# Altium PCB SSST.PcbDoc
Units mm, origin at the board's own origin, x right, y up, seen from the top; angles counter-clockwise.
Board outline 50 x 30 mm, 4 copper layers (L1, L2, L3, L4), stack 1.486 mm thick; 72 components, 50 nets, 284 pads, 90 vias.
Unrouted connection lines stored in the file: 1.
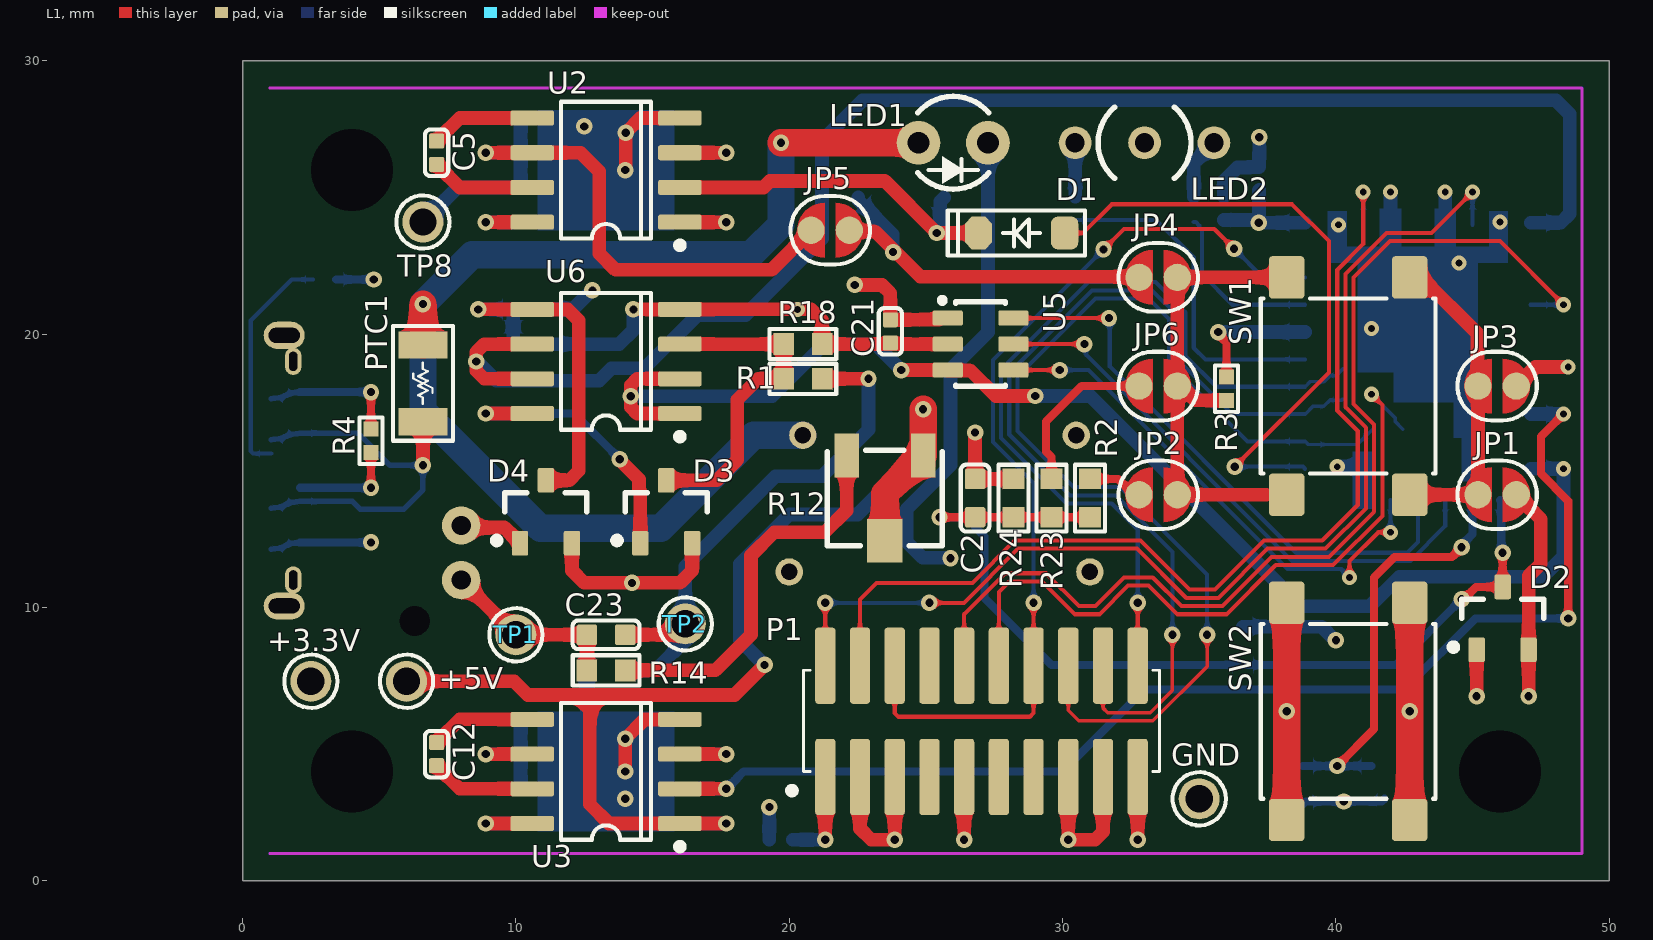
[diagram p0: L1 view]
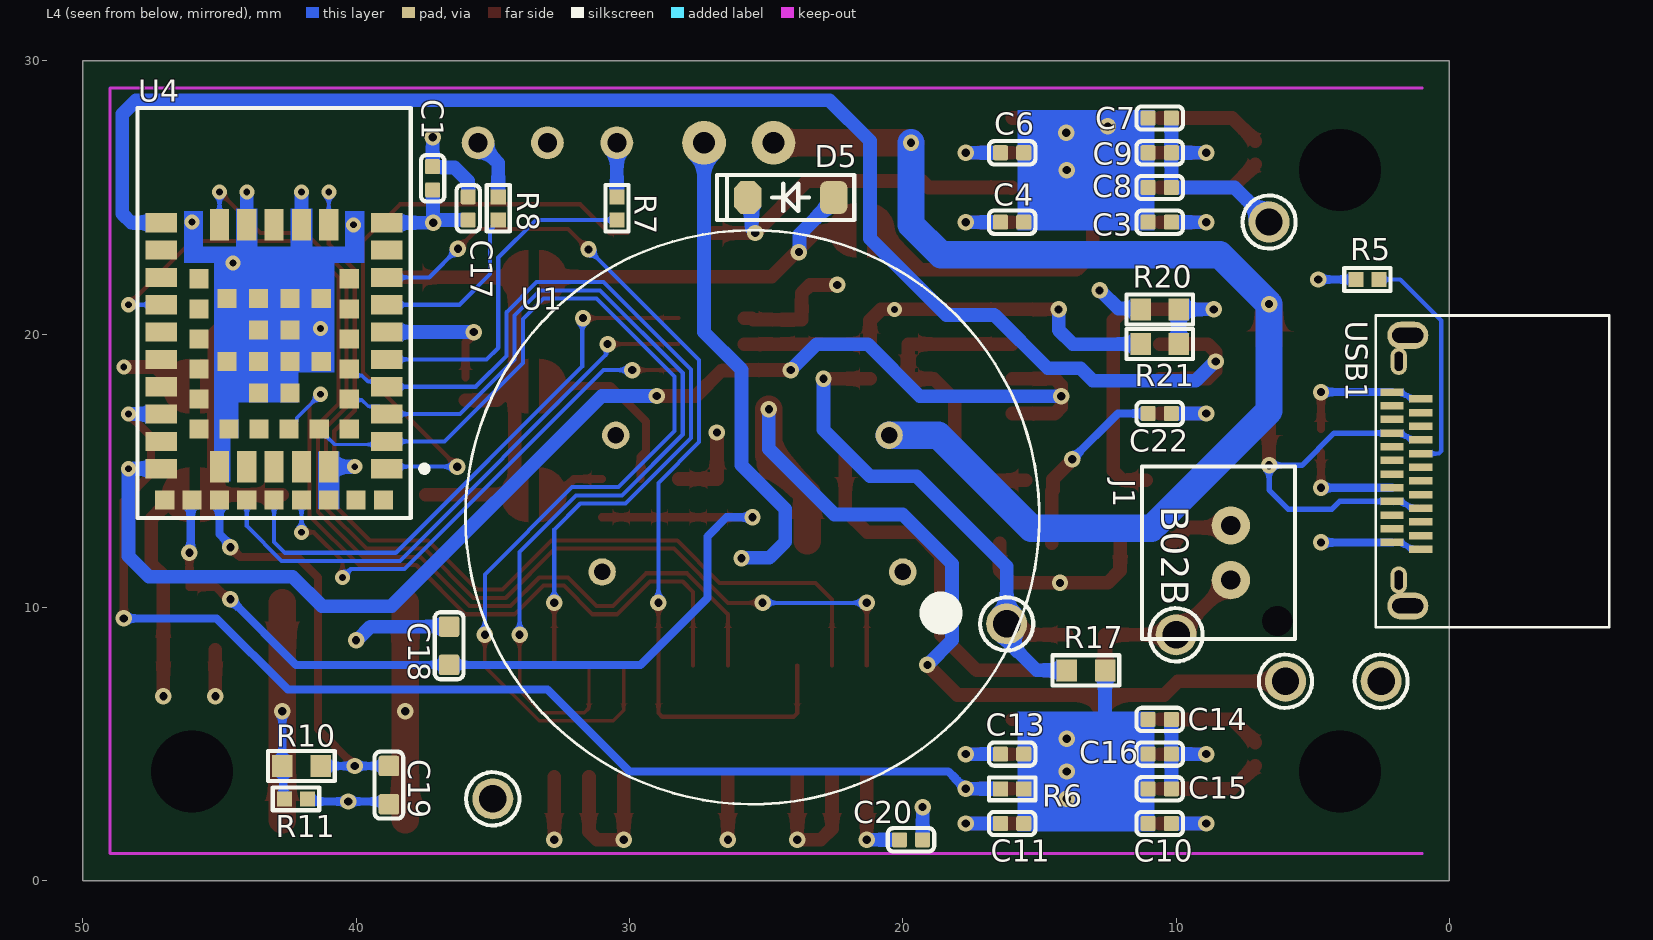
[diagram p1: L4 view, seen from below]
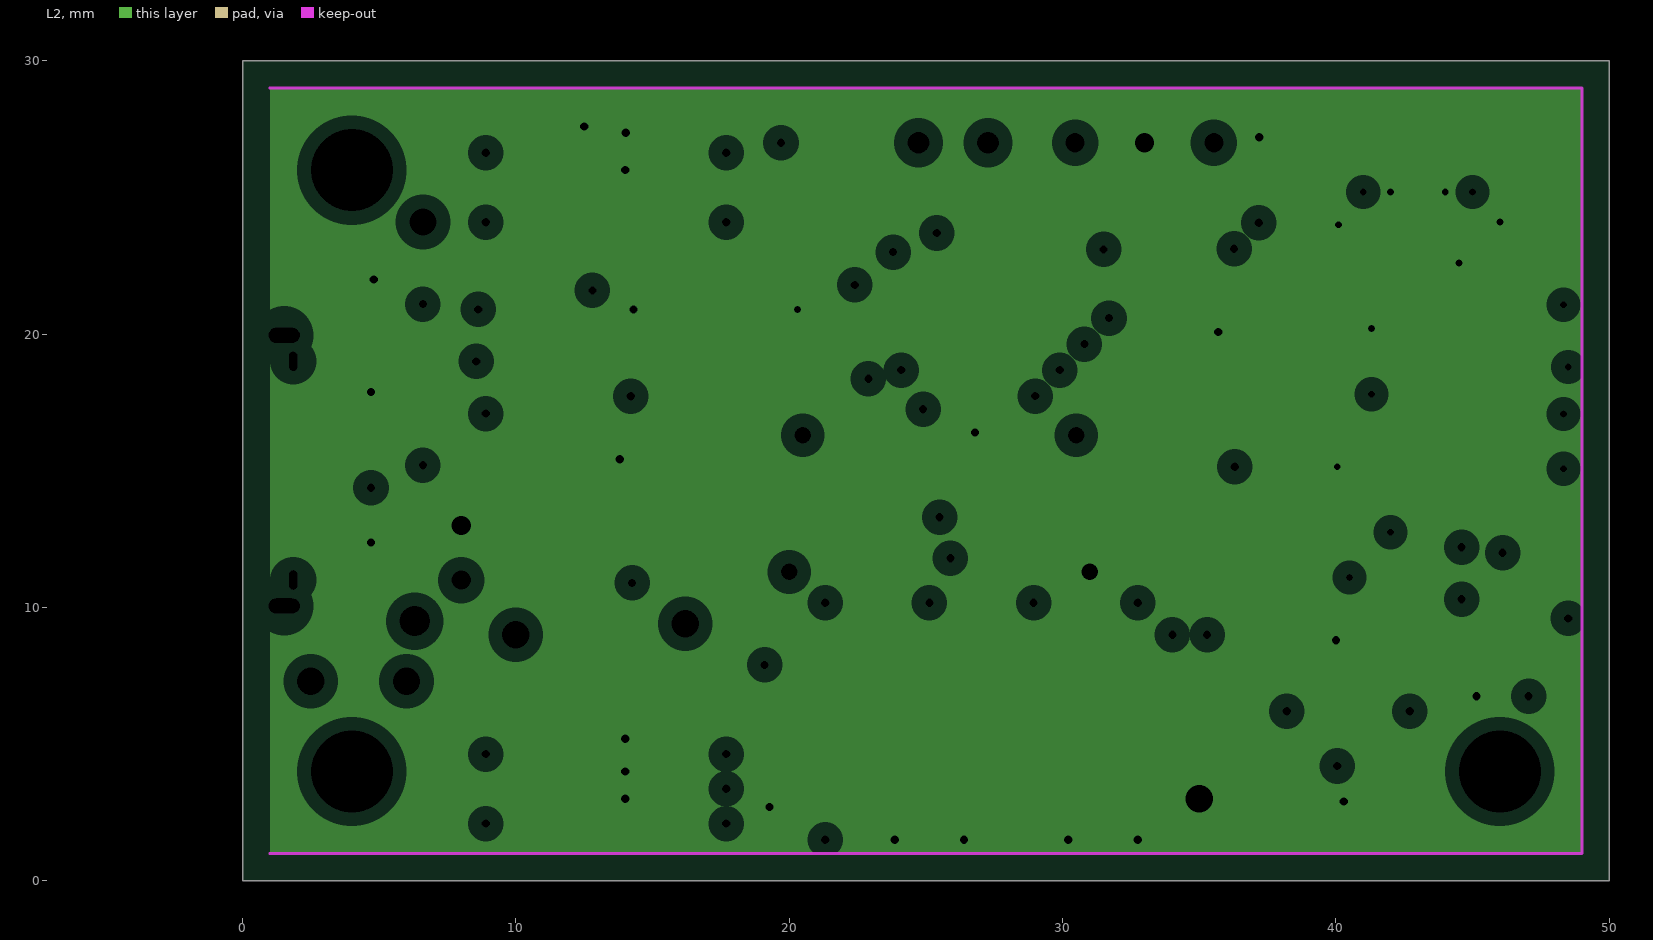
[diagram p2: L2, clearances drawn from the general rule]
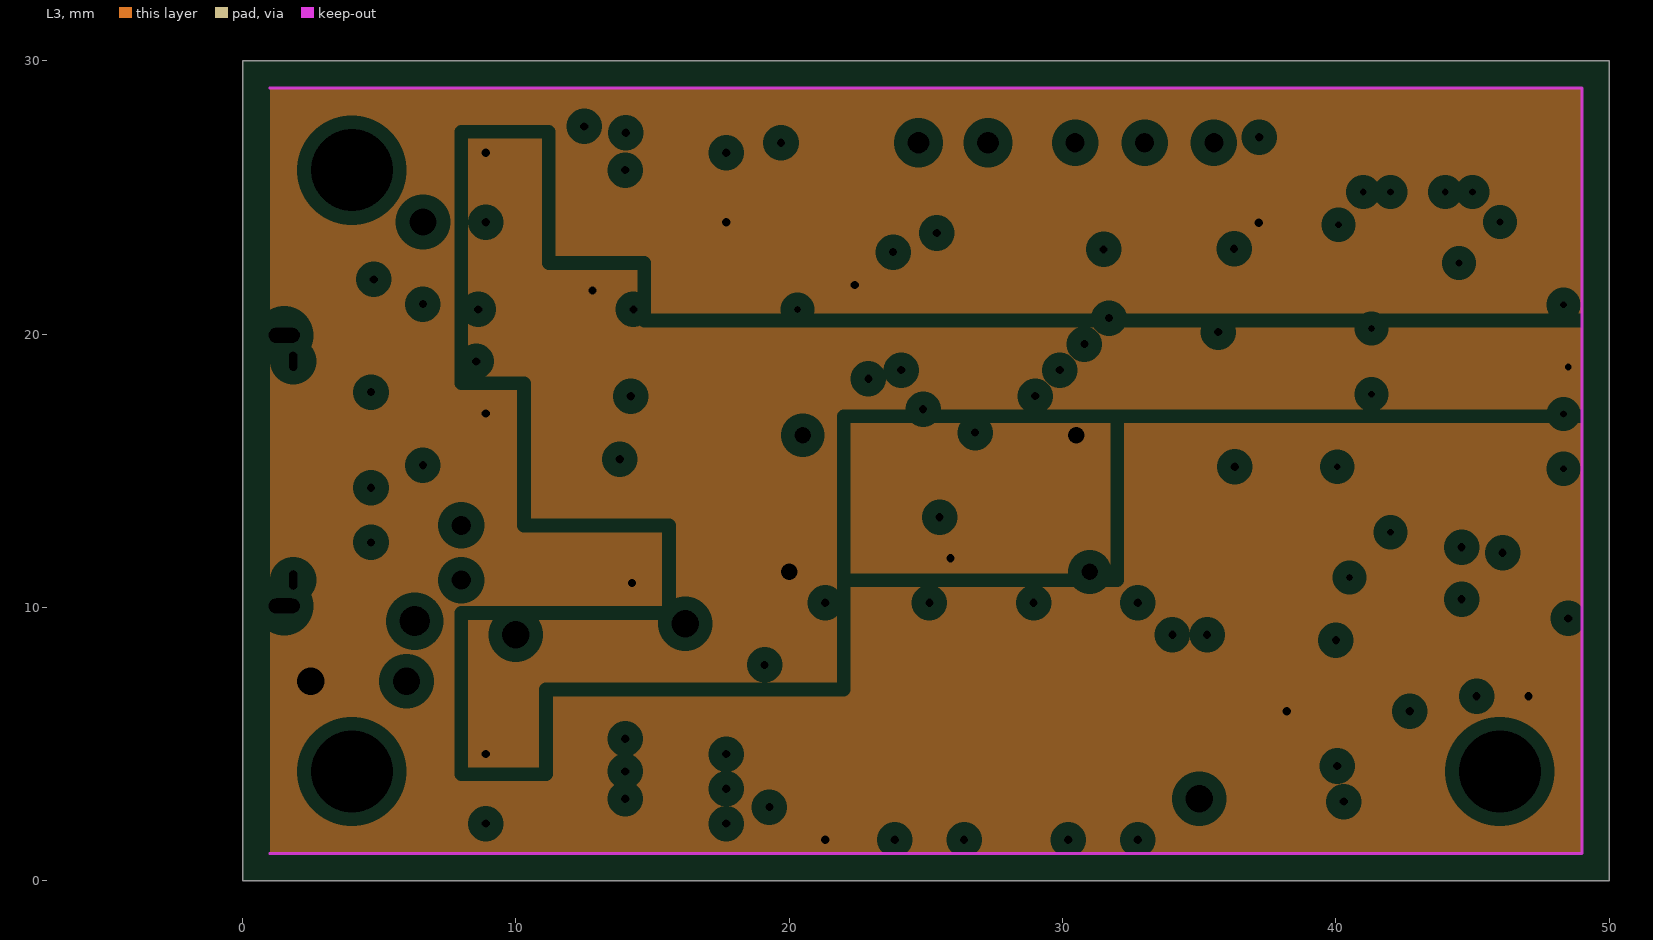
[diagram p3: L3, clearances drawn from the general rule]

## Layer stack, top to bottom
Top Solder: solder mask 0.01, Solder Resist, Dk 3.5
L1: signal copper 0.043
Prepreg: prepreg 0.2, R1551, Dk 4.8
L2: plane copper 0.035, net GND
Core: core 0.93, R1566, Dk 4.8
L3: plane copper 0.035, net (Multiple Nets)
Prepreg: prepreg 0.2, R1551, Dk 4.8
L4: signal copper 0.043
Bottom Solder: solder mask 0.01, Solder Resist, Dk 3.5

## Board outline
0,0 50,0 50,30 0,30

## Design rules (kind name [scope] priority, off if disabled: settings)
AcuteAngle [All] p1: minimum=4.50000000000000E+0001 checktracksonly=FALSE
AssemblyTestPointUsage [All] p1: valid=2
Clearance Clearance_BoardEdge_Poly [OnCopper and InPoly vs IsKeepOut] p1: gap=0.5 ignorepadtopadclearanceinfootprint=FALSE except(0: Arc-Hole Track-Hole SMDPad-Hole THPad-Hole Via-Hole Fill-Hole Poly-Hole Region-Hole Text-Hole)
Clearance Clearance_Poly [InPolygon] p2: gap=0.3 ignorepadtopadclearanceinfootprint=FALSE except(0: Arc-Hole Track-Hole SMDPad-Hole THPad-Hole Via-Hole Fill-Hole Poly-Hole Region-Hole Text-Hole)
Clearance [All] p3: gap=0.15 ignorepadtopadclearanceinfootprint=FALSE except(0: Arc-Hole Track-Hole SMDPad-Hole THPad-Hole Via-Hole Fill-Hole Poly-Hole Region-Hole Text-Hole)
DiffPairsRouting [All] p1: maxlimit=0.3 minlimit=0.15 mostfreqgap=0.15 toplayer_minwidth=0.16 toplayer_maxwidth=0.3 toplayer_prefwidth=0.16 bottomlayer_minwidth=0.16 bottomlayer_maxwidth=0.3 bottomlayer_prefwidth=0.16 maxuncoupledlength=5
FabricationTestPointUsage TestPointUsage [All] p1: valid=2 allowmultiple=FALSE
FabricationTestpoint Testpoint [All] p1: side=3 testpointundercomponent=TRUE minsize=1.016 maxsize=2.54 preferedsize=1.524 minholesize=0 maxholesize=1.016 preferedholesize=0.813 testpointgrid=0.025 allowsidetop=TRUE allowsidebottom=TRUE usegrid=TRUE gridtolerance=0
Height [All] p1: minheight=0 maxheight=30 prefheight=12.7
HoleSize [All] p1: absolutevalues=TRUE maxlimit=6 minlimit=0.25 maxpercent=80.000 minpercent=20.000
HoleToHoleClearance [All] p1: gap=0.45 allowstackedmicrovias=TRUE
MinimumAnnularRing [All] p1: minimumring=0.15
MinimumSolderMaskSliver [All] p1: minsoldermaskwidth=0.1
PlaneClearance [All] p1: clearance=0.5
PlaneConnect PlaneConnect_Via [IsVia] p1: planeconnectstyle=Direct reliefexpansion=0.508 reliefentries=4 reliefconductorwidth=0.254 reliefairgap=0.254
PlaneConnect [All] p2: planeconnectstyle=Relief reliefexpansion=0.3 reliefentries=4 reliefconductorwidth=0.3 reliefairgap=0.3
PolygonConnect PolygonConnect_Via [IsVia] p1: connectstyle=Direct reliefconductorwidth=0.254 reliefentries=4 polygonreliefangle="90 Angle" airgapwidth=0.254
PolygonConnect [All] p2: connectstyle=Relief reliefconductorwidth=0.3 reliefentries=4 polygonreliefangle="90 Angle" airgapwidth=0.3
RoutingVias [All] p1: holewidth=0.3 width=0.6 viastyle="Through Hole" minholewidth=0.25 minwidth=0.55 maxholewidth=6 maxwidth=8
SilkToSilkClearance [All] p1 off: silktosilkclearance=0.1
SilkToSolderMaskClearance SilkscreenOverComponentPads [IsPad] p1: minsilkscreentomaskgap=0 clearancetoexposedcopper=FALSE
SolderMaskExpansion [All] p1: expansion=0.05 istentingtop=FALSE
Width [All] p1: maxlimit=10 minlimit=0.127 preferedwidth=0.15
18 further rules are at their usual default settings.

## Classes and differential pairs
component class U_POW: C2 C3 C4 C5 C6 C7 C8 C9 C10 C11 C12 C13 C14 C15 C16 C18 D1 D2 D5 JP1 JP2 JP3 JP4 JP5 JP6 LED1 PTC1 R2 R3 R4 R5 R6 R23 R24 SW1 TP7 TP8 TP9 TP10 U1 U2 U3 USB1
component class U_ADC: C21 C22 C23 D3 D4 J1 R1 R12 R14 R17 R18 R20 R21 TP1 TP2 U5 U6
component class U_MCU: C1 C17 C19 C20 LED2 P1 R7 R8 R10 R11 SW2 U4

## Components (designator, comment, footprint, x,y, rotation, side; value= is the part's Value field where it differs from the comment)
+3.3V "TP1mm" TP1mm 2.5,7.3 r0 top (schematic designator TP9)
+5V "TP1mm" TP1mm 6,7.3 r90 top (schematic designator TP10)
C1 "GRM155R60J106ME15D" C1005 37.2,25.7 r270 bottom
C2 "GRM188R72A104MA35D" C1608 26.8,14 r270 top
C3 "GRM155R61A475MEAAD" C1005 10.6,24.095 r180 bottom
C4 "GRM155R61A475MEAAD" C1005 16,24.095 r180 bottom
C5 "GRM155R61A224KE19J" C1005 7.1,26.635 r270 top
C6 "GRM155R61A102KA01D" C1005 16,26.635 r0 bottom
C7 "GRM155R60J106ME15D" C1005 10.6,27.905 r180 bottom
C8 "GRM155R60J106ME15D" C1005 10.6,25.365 r180 bottom
C9 "GRM155R61A475MEAAD" C1005 10.6,26.635 r180 bottom
C10 "GRM155R61A475MEAAD" C1005 10.6,2.095 r180 bottom
C11 "GRM155R61A475MEAAD" C1005 16,2.095 r180 bottom
C12 "GRM155R61A224KE19J" C1005 7.1,4.635 r270 top
C13 "GRM155R61A102KA01D" C1005 16,4.635 r0 bottom
C14 "GRM155R60J106ME15D" C1005 10.6,5.905 r180 bottom
C15 "GRM155R60J106ME15D" C1005 10.6,3.365 r180 bottom
C16 "GRM155R61A475MEAAD" C1005 10.6,4.635 r180 bottom
C17 "GRM155R61A104KA01J" C1005 35.9,24.6 r270 bottom
C18 "GRM188R72A104MA35D" C1608 36.6,8.6 r270 bottom
C19 "GRM188R72A104MA35D" C1608 38.8,3.5 r90 bottom
C20 "GRM155R61A104KA01J" C1005 19.7,1.5 r0 bottom
C21 "GRM155R61A104KA01J" C1005 23.7,20.1 r90 top
C22 "GRM155R61A104KA01J" C1005 10.6,17.095 r180 bottom
C23 "GRM188D71A106KA73D" C1608 13.3,9 r180 top
D1 "CDBW0520L-G" SOD-123 28.5,23.7 r0 top
D2 "BAT54SHE3-TP" SOT-23 46.1,9.6 r90 top
D3 "BAT54SHE3-TP" SOT-23 15.5,13.5 r90 top
D4 "BAT54SHE3-TP" SOT-23 11.1,13.5 r90 top
D5 "CDBW0520L-G" SOD-123 24.1,25 r180 bottom
GND "TP1mm" TP1mm 35,3 r0 top (schematic designator TP7)
J1 "B02B-PASK-1" B02B-PASK-1 8,12 r270 bottom
JP1 "SMD_JAMPER" SMD_JAMPER 45.9,14.125 r180 top
JP2 "SMD_JAMPER" SMD_JAMPER 33.5,14.125 r180 top
JP3 "SMD_JAMPER" SMD_JAMPER 45.9,18.1 r180 top
JP4 "SMD_JAMPER" SMD_JAMPER 33.5,22.075 r180 top
JP5 "SMD_JAMPER" SMD_JAMPER 21.5,23.8 r0 top
JP6 "SMD_JAMPER" SMD_JAMPER 33.5,18.1 r180 top
LED1 "WP710A10QBC/D" LED_T1 26,27 r90 top
LED2 "EALP03RDHRGA1" LED3COLORS 33,27 r180 top
P1 "FTSH-110-01-F-DV-K-P-TR" "Headerpin 2x10" 21.32,3.8 r90 top locked
PTC1 "1206L016WR" 1206L 6.6,18.2 r90 top
R1 "RG1608P-114-B-T5" R1608 20.5,18.365 r180 top
R2 "RT0603BRE0710KL" R1608 31,14 r270 top
R3 "RT0402BRD0710KL" R1005 36,18 r270 top
R4 "RG1005P-512-B-T5" R1005 4.7,16.1 r90 top
R5 "RG1005P-512-B-T5" R1005 3,22 r0 bottom
R6 "RG1005P-103-B-T5" R1005 16,3.365 r0 bottom
R7 "RT0402BRD073K3L" R1005 30.46,24.6 r270 bottom
R8 "RG1005P-332-B-T5" R1005 34.8,24.6 r270 bottom
R10 "RT0603BRE0710KL" R1608 42,4.2 r180 bottom
R11 "RG1005P-103-B-T5" R1005 42.2,3 r0 bottom
R12 "SM-3TW502" SM-3TW 23.5,14 r270 top
R14 "RT0603CRE071KL" R1608 13.3,7.7 r0 top
R17 "RT0603DRD071ML" R1608 13.3,7.7 r0 bottom
R18 "RT0603DRD07200KL" R1608 20.5,19.635 r180 top
R20 "RT0603BRE0730KL" R1608 10.6,20.905 r180 bottom
R21 "RG1608P-114-B-T5" R1608 10.6,19.635 r180 bottom
R23 "RT0603BRE0730KL" R1608 29.6,14 r270 top
R24 "RG1608P-114-B-T5" R1608 28.2,14 r270 top
SW1 "PTS645SK95SMTR92LFS" PTS645SK13SMTR92LFS 40.45,18.1 r270 top
SW2 "PTS645SK95SMTR92LFS" PTS645SK13SMTR92LFS 40.45,6.2 r90 top
TP1 "TP1mm" TP1mm 10,9 r0 top
TP2 "TP1mm" TP1mm 16.2,9.4 r0 top
TP8 "TP1mm" TP1mm 6.6,24.1 r0 top
U1 "CLB2032BUPB" CLB2032BUPB 25.5,13.3 r180 bottom locked
U2 "LTC1682IS8-3.3#PBF" SOIC8_3.9mm 13.3,26 r180 top
U3 "LTC1682IS8-5#PBF" SOIC8_3.9mm 13.3,4 r180 top
U4 "NINA-B302" NINA_LGA67R_1500X1000X338_PIFA 43,20.775 r90 bottom locked
U5 "AD7680BRJZ" SOT-23-6 27,19.635 r270 top
U6 "OPA2330AIDR" SOIC8_3.9mm 13.3,19 r180 top
USB1 "DX07W024JA1R1000" DX07W024JA1R1000 2.1,12.379 r90 bottom locked

## Footprints (in the part's own frame and the unit in brackets; to place one, negate y for a bottom-side part, rotate by r counter-clockwise, add the part's x,y. Pads: shape width x height; smd on the part's side, far side on the other; paste and mask are expansions set on the pad)
1206L [mm] "Resettable PTC 3.2mm x 1.6mm"
  rect 1x1.8 smd mask+0.05: 1(-1.4,0) 2(1.4,0)
  silkscreen extent -2.1,-1.1 2.1,1.1, body extent -1.6,-0.8 1.6,0.85, height 1
B02B-PASK-1 [mm] "JST2ピンコネクタ"
  round 1.4 hole 0.7: 1(1,0) 2(-1,0)
  round 0.8 hole 1.1 unplated: boss(2.5,1.7)
  silkscreen extent -3.15,-3.25 3.15,2.35, body extent -3,-3.1 3,2.2, height 7.75
C1005 [mm] "Ceramic capacitor 1mm x 0.5mm"
  rrect20% 0.55x0.55 smd mask+0.05: 1(-0.425,0) 2(0.425,0)
  silkscreen extent -0.85,-0.43 0.85,0.43, body extent -0.5,-0.25 0.5,0.25, height 0.5
C1608 [mm] "Ceramic capacitor 1.6mm x 0.8mm"
  rrect20% 0.75x0.75 smd mask+0.05: 1(-0.7,0) 2(0.7,0)
  silkscreen extent -1.23,-0.53 1.23,0.53, body extent -0.8,-0.4 0.8,0.4, height 0.8
CLB2032BUPB [mm] "3.7V出力電池　ピン出力タイプ"
  round 1 hole 0.6: 1(5.5,-2) 2(5,3) 3(-5,3) 4(-5.5,-2)
  silkscreen extent -10.5,-10.5 10.5,10.5, body extent -10.27,-10.27 10.27,10.27, height 5
DX07W024JA1R1000 [mm] "USB3.1 Type-C"
  rect 0.27x0.85 smd paste+0 mask+0.05: A1(0,0) A2(0.5,0) A3(1,0) A4(1.5,0) A5(2,0) A6(2.5,0) A7(3,0) A8(3.5,0) A9(4,0) A10(4.5,0) A11(5,0) A12(5.5,0) B1(5.25,-1.05) B2(4.75,-1.05) B3(4.25,-1.05) B4(3.75,-1.05) B5(3.25,-1.05) B6(2.75,-1.05) B7(2.25,-1.05) B8(1.75,-1.05) B9(1.25,-1.05) B10(0.75,-1.05) B11(0.25,-1.05) B12(-0.25,-1.05)
  oval 1x1.5 hole 0.55 slot 1.15 at 90 deg mask+0.05: S(-2.325,-0.575) S(7.575,-0.575)
  oval 1x0.6 hole 0.3 slot 0.7 at 0 deg mask+0.05: S(-1.375,-0.245) S(6.625,-0.245)
  silkscreen extent -3.1,-7.94 8.3,0.6, body extent -2.97,-7.88 8.23,0.17, height 3.6
"Headerpin 2x10" [mm] "Headerpin 2x10,1.27mm Pitch"
  rrect30% 2.79x0.74 smd: 1(0,0) 2(4.07,0) 3(0,-1.27) 4(4.07,-1.27) 5(0,-2.54) 6(4.07,-2.54) 7(0,-3.81) 8(4.07,-3.81) 9(0,-5.08) 10(4.07,-5.08) 11(0,-6.35) 12(4.07,-6.35) 13(0,-7.62) 14(4.07,-7.62) 15(0,-8.89) 16(4.07,-8.89) 17(0,-10.16) 18(4.07,-10.16) 19(0,-11.43) 20(4.07,-11.43)
  silkscreen extent -0.62,-12.23 3.9,1.34, body extent -0.92,-12.05 6.45,0.65, height 6.99
LED3COLORS [mm]
  round 1.2 hole 0.7: 1(-2.54,0) 2(0,0) 3(2.54,0)
  silkscreen extent -1.7,-1.3 1.7,1.3, body extent -2.25,-1.5 2.25,1.9, height 9.5
LED_T1 [mm] "3mm (T1) package"
  round 1.6 hole 0.8: A(0,1.27) K(0,-1.27)
  silkscreen extent -1.7,-1.3 1.7,1.3, body extent -2,-1.5 2,2, height 9.6
NINA_LGA67R_1500X1000X338_PIFA [mm] "Stand-alone Bluetooth low energy module"
  rect 0.7x1.15 smd paste+0 mask+0.05: 1(-5.7,-4.125) 2(-4.7,-4.125) 3(-3.7,-4.125) 4(-2.7,-4.125) 5(-1.7,-4.125) 6(-0.7,-4.125) 7(0.3,-4.125) 8(1.3,-4.125) 9(2.3,-4.125) 10(3.3,-4.125) 16(3.3,4.125) 17(2.3,4.125) 18(1.3,4.125) 19(0.3,4.125) 20(-0.7,4.125) 21(-1.7,4.125) 22(-2.7,4.125) 23(-3.7,4.125) 24(-4.7,4.125) 25(-5.7,4.125)
  rect 1.15x0.7 smd paste+0 mask+0.05: 11(3.225,-2) 12(3.225,-1) 13(3.225,0) 14(3.225,1) 15(3.225,2) 26(-5.625,2) 27(-5.625,1) 28(-5.625,0) 29(-5.625,-1) 30(-5.625,-2)
  rect 0.7x0.7 smd paste+0 mask+0.05: 31(-4.25,-2.75) 32(-3.15,-2.75) 33(-2.05,-2.75) 34(-0.95,-2.75) 35(0.15,-2.75) 36(1.25,-2.75) 37(1.25,2.75) 38(0.15,2.75) 39(-0.95,2.75) 40(-2.05,2.75) 41(-3.15,2.75) 42(-4.25,2.75) 43(-4.25,1.65) 44(-4.25,0.55) 45(-4.25,-0.55) 46(-4.25,-1.65) 47(-6.85,4) 48(-6.85,3) 49(-6.85,2) 50(-6.85,1) 51(-6.85,0) 52(-6.85,-1) 53(-6.85,-2) 54(-6.85,-3) 55(-6.85,-4) 56(-2.925,-0.575) 57(-2.925,0.575) 58(-1.775,-1.725) 59(-1.775,-0.575) 60(-1.775,0.575) 61(-1.775,1.725) 62(-0.625,-0.575) 63(-0.625,0.575) 64(0.525,-1.725) 65(0.525,-0.575) 66(0.525,0.575) 67(0.525,1.725)
  silkscreen extent -7.5,-5.6 7.5,5, body extent -7.5,-5 7.5,5, height 3.91
PTS645SK13SMTR92LFS [mm]
  rrect20% 1.55x1.3 smd: 1(-3.975,2.25) 2(3.975,2.25) 3(-3.975,-2.25) 4(3.975,-2.25)
  silkscreen extent -3.2,-3.2 3.2,3.2, body extent -4.5,-3 4.5,3, height 9.5
R1005 [mm]
  rect 0.55x0.55 smd mask+0.05: 1(-0.425,0) 2(0.425,0)
  silkscreen extent -0.85,-0.42 0.85,0.42, body extent -0.5,-0.25 0.5,0.25, height 0.35
R1608 [mm]
  rect 0.75x0.8 smd mask+0.05: 1(-0.7,0) 2(0.7,0)
  silkscreen extent -1.22,-0.55 1.22,0.55, body extent -0.8,-0.4 0.8,0.4, height 0.45
SM-3TW [mm] "SURFACE MOUNT CERMET TRIMMER Top adjustmet"
  rect 1.6x0.9 smd: 1(-1.56,1.4) 3(-1.56,-1.4)
  rect 1.6x1.3 smd: 2(1.56,0)
  silkscreen extent -1.75,-2.1 1.75,2.1, body extent -1.6,-1.95 1.6,1.95, height 4.2
SMD_JAMPER [mm]
  round 1 smd: 1(-0.7,0) 2(0.7,0)
  L1 region: 0.2,1 0.2,-1 0.583,-0.924 0.907,-0.707 1.124,-0.383 1.2,0 1.2,0 1.124,0.383 0.907,0.707 0.583,0.924 0.2,1
  L1 region: -0.2,1 -0.2,-1 -0.583,-0.924 -0.907,-0.707 -1.124,-0.383 -1.2,0 -1.2,0 -1.124,0.383 -0.907,0.707 -0.583,0.924 -0.2,1
  silkscreen extent -1.45,-1.25 1.45,1.25
SOD-123 [mm]
  rrect50% 1x1.2 smd: A(1.575,0)
  oct 1x1.2 smd: K(-1.575,0)
  silkscreen extent -2.7,-0.82 2.32,0.82, body extent -1.96,-0.9 1.96,0.9, height 1.35
SOIC8_3.9mm [mm] "3.9mm Wide,1.27mm Pitch"
  rrect30% 1.6x0.55 smd: 1(-2.7,1.905) 2(-2.7,0.635) 3(-2.7,-0.635) 4(-2.7,-1.905) 5(2.7,-1.905) 6(2.7,-0.635) 7(2.7,0.635) 8(2.7,1.905)
  silkscreen extent -2.83,-2.5 1.65,2.87, body extent -3.1,-2.5 3.1,2.5, height 1.75
SOT-23 [mm] "SOT23, 3-Leads, Body 2.9x1.3mm, Pitch 0.95mm, Lead Span 2.4mm"
  rrect20% 0.9x0.6 smd: 1(-1.15,0.95) 2(-1.15,-0.95) 3(1.15,0)
  silkscreen extent -1.17,-1.5 0.7,1.92, body extent -1.5,-1.5 1.5,1.5, height 1.3
SOT-23-6 [mm] "SOT-23/SC-74A; 6 Leads; Body 3.1 x 3.1 mm"
  rrect20% 0.55x1.1 smd: 1(-0.95,-1.2) 2(0,-1.2) 3(0.95,-1.2) 4(0.95,1.2) 5(0,1.2) 6(-0.95,1.2)
  silkscreen extent -1.7,-1.5 1.55,0.9, body extent -1.45,-1.4 1.45,1.4, height 1.45
TP1mm [mm] "TEST POINT 径1mm"
  round 1.5 hole 1: 1(0,0)
  silkscreen extent -0.97,-0.97 0.97,0.97

## Part data
+3.3V +5V GND TP1 TP2 TP8: "Test-Point 1mm"
C1 C7 C8 C14 C15: library part C1005, "セラコン1005サイズ", Voltage=6.3V, Tag=10μF, Vendor=murata
C2 C18 C19: library part C1608, "セラコン1608サイズ", Voltage=100V, Tag=0.1μ, Vendor=murata
C3 C4 C5 C6 C9 C10 C11 C12 C13 C16 C17 C20 C21 C22: library part C1005, "セラコン1005サイズ", Voltage=10V, Vendor=murata
  C3 C4 C9 C10 C11 C16: Tag=4.7μF
  C5 C12: Tag=0.22μF
  C6 C13: Tag=1000pF
  C17 C20 C21 C22: Tag=0.1μF
C23: library part C1608, "セラコン1608サイズ", Voltage=10V, Tag=10μF, Vendor="TDK Corporation"
D1 D5: "Schottky Rectifier", Current=500mA, Voltage=20V, Vendor="Comchip Technology"
D2 D3 D4: library part BAT54S, "ダブル直列ショットキー", Vendor="Micro Commercial Co"
J1: "雄,ストレート,1列2ピン", Vendor=JST
LED1: library part WP710A10GD, "LED T1 GREEN", Color=Green, Vendor=Kingbright
LED2: library part OSRGHC3131A, "2色LED（赤,青）", Vendor=AKIZUKI
P1: "Header, 2 x 10 -Pin 1.27mm"
PTC1: library part 1206L, "Resettable PTC", Voltage=30V, Vendor=Littelfuse
R1 R2 R10 R14 R17 R18 R20 R21 R23 R24: library part MF1608, "薄膜チップ抵抗1608サイズ"
  R1 R21 R24: Tag=110k, Vendor=susumu
  R2 R10: Tag=10k, Vendor=susumu
  R14: Tag=1k, Vendor=susumu
  R17: Tag=1M, Vendor=Yageo
  R18: Tag=200k, Vendor=susumu
  R20 R23: Tag=30k, Vendor=susumu
R3 R4 R5 R6 R7 R8 R11: library part MF1005, "薄膜チップ抵抗1005サイズ", Vendor=susumu
  R3 R6 R11: Tag=10k
  R4 R5: Tag=5.1k
  R7 R8: Tag=3.3k
R12: library part SM-3TW***, "CERMET TRIMMER 11 turns Top adjustmet", Tag=5k, Vendor=Copal
SW1 SW2: library part PTS645SK13SMTR92LFS, "Tactile Switch 6 x 6mm", Vendor=C&K
U1: "CLB電池ユニット　ピンタイプ"
U2: "IC REG CHARGE PUMP 3.3V 8SOIC"
U3: "IC REG CHARGE PUMP 5V MSOP8"
U4: "u-blox NINA-B302 Bluetooth 5 LE, 802.15.4 module", Manufacturer=u-blox, Part Description="Stand-alone Bluetooth low energy module"
U5: "16bit ADC 2.5V～5.5V SOT23", Vender="Analog Devices"
U6: "CMOS ゼロドリフトアンプ 2回路 レールツーレール 8SOIC", Vendor="Texas Instruments"
USB1: "USB3.1 Type-C", Vendor=JAE

## Free pads (board coordinates)
  round 0 hole 3 unplated: 3(4,4) 3(4,26) 3(46,4)

## Via types
v1: diameter 0.6, hole 0.3, L1 to L4, 73 vias
v2: diameter 0.55, hole 0.25, L1 to L4, 17 vias

## Nets (pads, with @x,y where several pads share a name; then routed paths per layer and width w, separated by ;. In a path a pad name is that pad's centre, name@x,y a point inside that pad or via, vN(x,y) a via of type N, cw(c..) or ccw(c..) an arc to the next point about the centre after c; other vN are vias at no path point)
+3.3V: +3.3V.1 C1.2 C4.1 C17.2 C20.2 C21.2 C22.2 D2.2 D3.2 D4.2 JP1.1 P1.1 SW2.1 SW2.2 U2.1 U4.10 U5.1 U6.8 | length 40.9
  L1 w0.5: v1(8.9,17.095) U6.8 ; D4.2 12.05,11.35 12.5,10.9 16,10.9 16.45,11.35 D3.2 ; U2.1 v1(17.7,24.095) ; v1(21.32,1.5) P1.1 ; v1(22.4,21.8) 23.4,21.8 23.7,21.5 23.7,20.55 C21.2 25.465,20.525 25.525,20.585 U5.1 ; JP1.1 47.5,13.225 47.5,11.6 47.05,11.15 D2.2 v1(47.05,6.75)
  L1 w1: SW2.1 SW2.2
  L4 w0.5: v1(8.9,17.095) C22.2 ; C4.1 v1(17.7,24.095) ; C20.2 v1(21.32,1.5) ; C17.2 37.048,24.175 37.148,24.075 v1(37.175,24.075) ; C1.2 37.187,25.262 37.187,24.087 v1(37.175,24.075) ; U4.10 v1(37.175,24.075)
  other v1: 38.2,6.2 14.25,10.9
+5V: +5V.1 C11.1 R12.1 R12.2 U3.1 | length 45.2
  L1 w0.5: +5V.1 9.935,7.3 10.435,6.8 12.7,6.8 ; 12.181,6.8 12.681,6.3 ; 12.7,6.3 13.2,6.8 ; v1(17.7,2.095) U3.1 13.405,2.095 12.7,2.8 12.7,6.8 ; v1(19.1,7.9) 18,6.8 12.7,6.8
  L1 w1: R12.2 23.5,14.16 24.6,15.26 24.85,15.26 24.85,15.51 R12.1 v1(24.9,17.25)
  L4 w0.5: C11.1 v1(17.7,2.095) ; v1(19.1,7.9) 18.2,8.8 18.2,11.6 20,13.4 22.5,13.4 24.9,15.8 v1(24.9,17.25)
AIN_BLOOD_SENS: U4.25 U5.3 U6.1 U6.2 | length 48.6
  L1 w0.5: U6.1 14.435,17.095 14.2,17.33 v1(14.2,17.73) 14.2,18.13 14.435,18.365 U6.2 ; v1(24.1,18.685) U5.3 25.825,18.66 26.64,18.66 27.565,17.735 v1(29,17.735)
  L4 w0.5: v1(14.2,17.73) 19.38,17.73 21.285,19.635 23.15,19.635 v1(24.1,18.685) ; v1(29,17.735) 31.015,17.735 38.7,10.05 41.25,10.05 42.325,11.125 47.575,11.125 48.325,11.875 v2(48.325,15.075) U4.25
BTN_ADC_CHG: C19.2 R10.2 U4.49 | length 15.5
  L1 w0.3: v1(40.05,4.2) 41.4,5.55 41.4,11.1 42.147,11.847 44.247,11.847 v1(44.6,12.2)
  L4 w0.3: C19.2 v1(40.05,4.2) R10.2 ; v1(44.6,12.2) 44.6,12.281 45,12.681 U4.49
GND: C1.1 C2.1 C3.1 C4.2 C6.1 C7.1 C8.1 C9.1 C10.1 C11.2 C13.1 C14.1 C15.1 C16.1 C17.1 C18.1 C19.1 C20.1 C21.1 C22.1 D2.1 D3.1 D4.1 GND.1 J1.2 LED2.2 P1.3 P1.5 P1.9 P1.15 P1.17 P1.19 R3.1 R4.2 R5.2 R6.1 R11.1 R17.1 R18.1 R21.1 R24.1 U1.4 U2.4 U3.4 U4.6 U4.12 U4.14 U4.26 U4.30 U4.43 U4.53 U4.56 U4.57 U4.58 U4.59 U4.60 U4.61 U4.62 U4.63 U4.64 U4.65 U4.66 U4.67 U5.2 U6.4 USB1.A1 USB1.A12 USB1.B1 USB1.B12 | length 87
  L1 w0.3: R4.2 v1(4.7,17.879) ; v1(35.7,20.075) 35.7,19.994 36,19.694 R3.1
  L1 w0.5: J1.2@8.077,12.923 9.577,12.923 D4.1 ; v1(13.8,15.425) 13.8,15.398 14.507,14.691 14.507,14.293 14.55,14.25 D3.1 ; v1(14,4) v1(14,5.2) 14.705,5.905 U3.4 ; v1(14,26) 14.019,26.019 v1(14.019,27.369) 14.555,27.905 U2.4 ; v1(14.3,20.905) U6.4 20.795,20.905 21.2,20.5 R18.1 U5.2 ; P1.3 22.59,1.91 23,1.5 v1(23.86,1.5) ; v1@23.86,1.505 P1.5 ; v1(26.4,1.5) P1.9 ; v1(26.8,16.4) C2.1 R24.1 ; P1.15 v1(30.21,1.5) 31.187,1.5 31.48,1.793 P1.17 ; v1(32.75,1.5) P1.19 ; v1(45.15,6.75) D2.1
  L1 w1: J1.2 J1.2@8.077,12.923
  L4 w0.2: USB1.B12 1.375,12.164 1.775,12.344 USB1.A1 ; USB1.B1 1.375,17.664 1.775,17.844 USB1.A12
  L4 w0.3: USB1.A1 v1(4.7,12.379) ; USB1.A12 v1(4.7,17.879) ; R5.2 v1(4.8,22) ; C22.1 12.13,17.095 v1(13.8,15.425) ; C19.1 38.9,2.9 41.675,2.9 R11.1
  L4 w0.5: R21.1 13.785,19.635 14.3,20.15 v1(14.3,20.905) ; R17.1 12.6,4.7 13.3,4 ; C20.1 v1(19.275,2.695) ; v1(35.7,20.075) U4.6 ; C17.1 35.902,25.027 35.902,25.602 36.4,26.1 37.175,26.1 C1.1 v1(37.2,27.2) ; C18.1 39.473,9.3 39.973,8.8 v1(40,8.8) ; v2(40.05,15.15) U4.30 ; U4.12 v2(42,25.2) ; U4.14 v2(44,25.2)
  other v1: 40.288,2.9 14,3 12.5,27.6
  other v2: 41.3,20.2 20.3,20.9 44.5,22.6 40.1,24 46,24.1
LED_BATT: R7.2 U4.5 | length 12.5
  L4 w0.15: R7.2 33.425,24.175 34.8,22.8 34.8,19.5 35.225,19.075 U4.5
LED_STATUS: R8.2 U4.7 | length 6.3
  L4 w0.15: R8.2@34.8,24.1 34.875,24.1 35,23.975 35,23.9 35.1,23.8 35.1,22.2 36.225,21.075 U4.7
NetC2_2: C2.2 C18.2 D2.3 R2.2 R23.2 R24.2 U4.48 | length 34.1
  L1 w0.3: v1(25.5,13.3) C2.2 R24.2 R23.2 R2.2 ; v1(44.6,10.3) 44.681,10.3 45.131,10.75 D2.3 v1(46.1,12)
  L4 w0.3: v1(25.5,13.3) 26.45,13.3 27.15,12.6 27.15,10.35 29.6,7.9 42.2,7.9 v1(44.6,10.3) ; U4.48 46.05,13.875 46.05,12.05 v1(46.1,12)
NetC3_2: C3.2 U2.8 | length 3
  L1 w0.5: v1(8.9,24.095) U2.8
  L4 w0.5: v1(8.9,24.095) C3.2
NetC5_1: C5.1 U2.5 | length 3.9
  L1 w0.5: C5.1 7.945,27.905 U2.5
NetC5_2: C5.2 U2.7 | length 3.9
  L1 w0.5: C5.2 7.945,25.365 U2.7
NetC6_2: C6.2 U2.3 | length 3
  L1 w0.5: U2.3 v1(17.7,26.635)
  L4 w0.5: C6.2 v1(17.7,26.635)
NetC7_2: C7.2 C8.2 C9.2 C14.2 C15.2 C16.2 JP3.1 JP5.1 R20.1 TP8.1 U1.1 U2.6 U3.6 | length 33.4
  L1 w0.5: v1(8.9,4.635) U3.6 ; v1(8.9,26.635) U2.6 12.365,26.635 13.05,25.95 13.05,22.95 13.65,22.35 19.35,22.35 JP5.1 ; JP3.1 47.3,18.8 v2(48.5,18.8)
  L4 w0.5: TP8.1 7.865,25.365 C8.2 C9.2 ; v1(8.9,4.635) C16.2 ; v1(8.9,26.635) C9.2 ; C15.2 C16.2 ; C14.2 C16.2 ; C7.2 C9.2 ; R20.1 11.329,20.934 12.107,20.934 12.773,21.6 v1(12.8,21.6)
NetC10_2: C10.2 U3.8 | length 3
  L1 w0.5: v1(8.9,2.095) U3.8
  L4 w0.5: v1(8.9,2.095) C10.2
NetC12_1: C12.1 U3.5 | length 3.9
  L1 w0.5: C12.1 7.945,5.905 U3.5
NetC12_2: C12.2 U3.7 | length 3.9
  L1 w0.5: C12.2 7.945,3.365 U3.7
NetC13_2: C13.2 U3.3 | length 3
  L1 w0.5: U3.3 v1(17.7,4.635)
  L4 w0.5: C13.2 v1(17.7,4.635)
NetC23_1: C23.1 R1.1 R17.2 TP2.1 | length 20.1
  L1 w0.5: C23.1 15.8,9 TP2.1 ; R1.1 v1(22.9,18.365)
  L4 w0.5: R17.2 15.1,7.7 16.2,8.8 TP2.1 16.2,11.5 19.5,14.8 21.2,14.8 22.9,16.5 v1(22.9,18.365)
NetC23_2: C23.2 J1.1 R14.1 TP1.1 | length 6.7
  L1 w0.5: J1.1 TP1.1 C23.2 R14.1
NetD1_A: D1.A U4.1 | length 23
  L1 w0.15: D1.A 30.75,23.7 31.8,24.75 38.4,24.75 39.75,23.4 39.75,18.6 v1(36.3,15.15)
  L4 w0.15: v1(36.3,15.15) 38.8,15.15 U4.1
NetD1_K: D1.K D5.K U2.2 | length 13.3
  L1 w0.5: U2.2@16.025,25.34 U2.2 19.065,25.365 19.3,25.6 23.5,25.6 v1(25.4,23.7) D1.K
  L4 w0.5: v1(25.4,23.7) 25.4,23.727 25.529,23.856 25.529,24.854 D5.K
NetD3_3: D3.3 R1.2 R18.2 U6.3 | length 12.2
  L1 w0.5: D3.3 17.35,14.65 18.1,15.4 18.1,17.6 18.865,18.365 R1.2 R18.2 U6.3
NetD4_3: D4.3 R20.2 R21.2 U6.5 | length 13.2
  L1 w0.5: v1(8.625,20.905) U6.5 11.895,20.905 12.3,20.5 12.3,15 11.95,14.65 D4.3
  L4 w0.5: v1(8.625,20.905) R20.2 R21.2
NetD5_A: D5.A JP4.2 JP5.2 | length 13.8
  L1 w0.5: JP5.2 22.25,23.75 23.15,23.75 24.8,22.1 32.775,22.1 JP4.2
  L4 w0.5: D5.A 22.525,24.9 23.781,23.644 23.781,23.019 v1(23.8,23)
NetJP1_2: JP1.2 JP3.2 SW1.1 SW1.2 | length 11.7
  L1 w0.5: SW1.2 JP1.2 JP3.2 45.179,18.121 45.179,20.021 43.125,22.075 SW1.1
NetJP2_1: JP2.1 JP4.1 JP6.1 R3.2 SW1.3 SW1.4 | length 17.2
  L1 w0.5: R3.2 34.86,17.575 34.335,18.1 JP6.1 ; 37.45,14.125 JP2.1 JP6.1 ; SW1.3 JP4.1 JP6.1
NetJP2_2: JP2.2 R2.1 | length 2
  L1 w0.3: R2.1 32.036,14.7 32.611,14.125 JP2.2
NetJP6_2: JP6.2 R23.1 | length 6.1
  L1 w0.3: R23.1 29.6,15.5 29.4,15.7 29.4,16.8 30.7,18.1 JP6.2
NetLED1_A: LED1.A PTC1.2 U1.2 | length 44.8
  L1 w1: PTC1.2 v1(6.6,21.1) ; v1(19.7,27) LED1.A
  L4 w1: v1(19.7,27) 19.7,24 18.6,22.9 8.4,22.9 v1(6.6,21.1) 6.6,17.2 10.9,12.9 15.3,12.9 18.7,16.3 U1.2
NetLED1_K: LED1.K U1.3 | length 17.7
  L4 w0.5: v1(25.9,11.8) 25.881,11.819 24.881,11.819 24.3,12.4 24.3,13.6 25.9,15.2 25.9,18.7 27.27,20.07 LED1.K
NetLED2_1: LED2.1 R8.1 | length 2.3
  L4 w0.5: R8.1 34.8,26.26 LED2.1
NetLED2_3: LED2.3 R7.1 | length 2
  L4 w0.5: R7.1 LED2.3
NetPTC1_1: PTC1.1 USB1.A4 USB1.A9 USB1.B4 USB1.B9 | length 14.6
  L1 w0.5: v1(6.6,15.2) PTC1.1
  L4 w0.2: USB1.B9 1.375,13.664 1.775,13.844 USB1.A4 4.023,13.879 4.302,13.6 5.9,13.6 6.6,14.3 v1(6.6,15.2) 5.4,15.2 4.221,16.379 USB1.A9 1.775,16.344 1.375,16.164 USB1.B4
NetR4_1: R4.1 USB1.A5 | length 3.9
  L1 w0.3: v1(4.7,14.379) R4.1
  L4 w0.3: USB1.A5 v1(4.7,14.379)
NetR5_1: R5.1 USB1.B5 | length 8.5
  L4 w0.15: USB1.B5 0.388,15.629 0.3,15.717 0.3,20.5 1.8,22 R5.1
NetR6_2: R6.2 U3.2 U4.23 | length 45.8
  L1 w0.3: v2(48.325,17.075) 47.5,16.25 47.5,14.9 48.5,13.9 v1(48.5,9.6)
  L1 w0.5: U3.2 v1(17.7,3.365)
  L4 w0.3: v1(17.7,3.365) 18.335,4 30,4 33,7 42.5,7 45.1,9.6 v1(48.5,9.6)
  L4 w0.5: R6.2 v1(17.7,3.365) ; U4.23 v2(48.325,17.075)
NetR10_1: R10.1 R11.2 SW2.3 SW2.4 | length 11.2
  L1 w1: SW2.3 v1(42.7,6.2) SW2.4
  L4 w0.3: R11.2 42.663,3.038 42.663,4.163 R10.1 v1(42.7,6.2)
NetR12_3: R12.3 R14.2 | length 14.2
  L1 w0.5: R14.2 17.3,7.7 18.6,9 18.6,11.9 19.45,12.75 21.3,12.75 22.1,13.55 R12.3
NetU4_16: U4.16 U6.6 U6.7 | length 57.1
  L1 w0.5: U6.7 8.843,18.365 8.55,18.658 v1(8.55,19) 8.55,19.342 8.843,19.635 U6.6
  L4 w0.5: v1(8.55,19) 8.577,19 9.277,18.3 13.05,18.3 13.5,18.75 14.7,18.75 16.65,20.7 18.4,20.7 21.2,23.5 21.2,27.071 22.679,28.55 48.05,28.55 48.55,28.05 48.55,24.4 48.225,24.075 U4.16
NetU4_50: U4.50 U5.5 | length 20.8
  L1 w0.15: U5.5 v1(30.8,19.635)
  L4 w0.15: v1(30.8,19.635) 30.854,19.581 30.854,19.246 38.4,11.7 42.724,11.7 44,12.976 U4.50
NetU4_51: U4.51 U5.6 | length 21.1
  L1 w0.15: U5.6 v1(31.7,20.585)
  L4 w0.15: v1(31.7,20.585) 31.729,20.556 31.729,18.821 38.55,12 42.6,12 43,12.4 U4.51
NetU4_52: U4.52 U5.4 | length 19.2
  L1 w0.15: U5.4 v1(29.9,18.685) ; v2(40.5,11.1) 40.5,11.7 41.55,12.75 v2(42,12.75)
  L4 w0.15: v1(29.9,18.685) 30.95,18.685 38.235,11.4 40.2,11.4 v2(40.5,11.1) ; v2(42,12.75) U4.52
RESET: P1.10 U4.19 | length 39.6
  L1 w0.15: P1.10 26.4,9.75 27.9,11.25 29.4,11.25 30.6,10.05 31.2,10.05 32.25,11.1 33.3,11.1 34.35,10.05 35.85,10.05 37.65,11.85 39.75,11.85 41.4,13.5 41.4,16.7 40.65,17.45 40.65,22.076 41.974,23.4 46,23.4 v2(48.325,21.075)
  L4 w0.15: U4.19 v2(48.325,21.075)
SWDCLK: P1.4 U4.11 | length 36.9
  L1 w0.15: P1.4 22.59,10.29 23.2,10.9 26.7,10.9 28.25,12.45 32.85,12.45 34.65,10.65 35.576,10.65 37.376,12.45 39.501,12.45 40.8,13.749 40.8,16.451 40.05,17.201 40.05,22.35 41,23.3 v2(41,25.2)
  L4 w0.127: U4.11 v2(41,25.2)
SWDIO: P1.2 U4.15 | length 41
  L1 w0.15: P1.2 v1(21.32,10.17) ; v1(25.13,10.17) 26.394,10.17 28.374,12.15 32.726,12.15 34.526,10.35 35.7,10.35 37.5,12.15 39.626,12.15 41.1,13.624 41.1,15.014 41.1,16.576 40.35,17.326 40.35,22.2 41.85,23.7 43.5,23.7 v2(45,25.2)
  L4 w0.15: v1(21.32,10.17) v1(25.13,10.17) ; U4.15 v2(45,25.2)
SWO_TRACEDATA0: P1.6 P1.14 U4.8 | length 34.6
  L1 w0.15: P1.6 23.86,6.14 24,6 28.8,6 28.94,6.14 P1.14 v1(28.94,10.17) ; v1(31.5,23.1) 32.25,23.85 35.55,23.85 v1(36.275,23.125)
  L4 w0.15: v1(28.94,10.17) 28.94,14.56 27.45,16.05 27.45,19.05 v1(31.5,23.1) ; v1(36.275,23.125) 37.325,22.075 U4.8
TRACECLK: P1.12 U4.45 | length 26.1
  L1 w0.15: P1.12 27.67,10.57 28.05,10.95 29.25,10.95 30.45,9.75 31.35,9.75 32.4,10.8 33.15,10.8 34.2,9.75 36,9.75 37.8,11.55 39.9,11.55 41.7,13.35 41.7,17.4 v2(41.3,17.8)
  L4 w0.127: v2(41.3,17.8) 42.163,16.937 42.163,16.812 U4.45
TRACEDATA1: P1.16 U4.2 U4.46 | length 39.7
  L1 w0.127: P1.16 30.21,6.24 30.6,5.85 33.3,5.85 35.29,7.84 v1(35.29,9)
  L4 w0.127: U4.2 38.989,15.961 40.786,15.961 U4.46
  L4 w0.15: v1(35.29,9) 35.29,11.21 32.1,14.4 30.399,14.4 28.35,16.449 28.35,18.45 31.2,21.3 33.15,21.3 33.9,20.55 33.9,18.939 36.764,16.075 U4.2
TRACEDATA2: P1.18 U4.3 U4.32 | length 36.1
  L1 w0.127: P1.18 31.48,6.32 31.65,6.15 33.208,6.15 34.02,6.962 v1(34.02,9)
  L4 w0.127: U4.3 39.162,17.362 39.562,17.362 39.784,17.584 40.209,17.584 U4.32
  L4 w0.15: v1(34.02,9) 34.02,12.03 31.95,14.1 30.274,14.1 28.05,16.324 28.05,18.574 31.076,21.6 33.274,21.6 34.2,20.674 34.2,19.076 36.201,17.075 U4.3
TRACEDATA3: P1.20 U4.4 U4.33 | length 30.5
  L1 w0.15: P1.20 v1(32.75,10.17)
  L4 w0.127: U4.4 39.066,18.266 39.566,18.266 39.784,18.484 40.009,18.484 U4.33
  L4 w0.15: v1(32.75,10.17) 32.75,12.85 31.8,13.8 30.15,13.8 27.75,16.2 27.75,18.699 30.951,21.9 33.399,21.9 34.5,20.799 34.5,19.2 35.625,18.075 U4.4
pads on no net: J1.boss P1.7 P1.8 P1.11 P1.13 U4.9 U4.13 U4.17 U4.18 U4.20 U4.21 U4.22 U4.24 U4.27 U4.28 U4.29 U4.31 U4.34 U4.35 U4.36 U4.37 U4.38 U4.39 U4.40 U4.41 U4.42 U4.44 U4.47 U4.54 U4.55 USB1.A2 USB1.A3 USB1.A6 USB1.A7 USB1.A8 USB1.A10 USB1.A11 USB1.B2 USB1.B3 USB1.B6 USB1.B7 USB1.B8 USB1.B10 USB1.B11 USB1.S

## Polygon pours and split planes (outlines as drawn)
GND on L2 (split plane): 48.998,28.998 48.998,1.002 1.002,1.002 1.002,28.998
+3.3V on L3 (split plane): 48.998,28.998 48.998,20.752 14.952,20.752 14.952,22.6 14.944,22.665 14.918,22.726 14.878,22.778 14.826,22.818 14.765,22.844 14.7,22.852 11.452,22.852 11.452,27.4 11.444,27.465 11.418,27.526 11.378,27.578 11.326,27.618 11.265,27.644 11.2,27.652 8,27.652 7.935,27.644 7.874,27.618 7.822,27.578 7.782,27.526 7.756,27.465 7.748,27.4 7.748,18.2 7.756,18.135 7.782,18.074 7.822,18.022 7.874,17.982 7.935,17.956 8,17.948 10.048,17.948 10.048,13 10.056,12.935 10.082,12.874 10.122,12.822 10.174,12.782 10.235,12.756 10.3,12.748 15.348,12.748 15.348,10.052 8,10.052 7.935,10.044 7.874,10.018 7.822,9.978 7.782,9.926 7.756,9.865 7.748,9.8 7.748,3.9 7.756,3.835 7.782,3.774 7.822,3.722 7.874,3.682 7.935,3.656 8,3.648 11.1,3.648 11.165,3.656 11.226,3.682 11.278,3.722 11.318,3.774 11.344,3.835 11.352,3.9 11.352,6.748 22,6.748 22.065,6.756 22.126,6.782 22.178,6.822 22.218,6.874 22.244,6.935 22.252,7 22.252,10.748 32,10.748 32.065,10.756 32.126,10.782 32.178,10.822 32.218,10.874 32.244,10.935 32.252,11 32.252,16.748 48.998,16.748 48.998,1.002 1.002,1.002 1.002,28.998
NetC7_2 on L3 (split plane): 10.948,22.6 10.956,22.535 10.982,22.474 11.022,22.422 11.074,22.382 11.135,22.356 11.2,22.348 14.448,22.348 14.448,20.5 14.456,20.435 14.482,20.374 14.522,20.322 14.574,20.282 14.635,20.256 14.7,20.248 48.998,20.248 48.998,17.252 22,17.252 21.935,17.244 21.874,17.218 21.822,17.178 21.782,17.126 21.756,17.065 21.748,17 21.748,13 21.748,7.252 11.1,7.252 11.035,7.244 10.974,7.218 10.922,7.178 10.882,7.126 10.856,7.065 10.848,7 10.848,4.152 8.252,4.152 8.252,9.548 15.6,9.548 15.665,9.556 15.726,9.582 15.778,9.622 15.818,9.674 15.844,9.735 15.852,9.8 15.852,13 15.844,13.065 15.818,13.126 15.778,13.178 15.726,13.218 15.665,13.244 15.6,13.252 10.552,13.252 10.552,18.2 10.544,18.265 10.518,18.326 10.478,18.378 10.426,18.418 10.365,18.444 10.3,18.452 8.252,18.452 8.252,27.148 10.948,27.148
NetLED1_K on L3 (split plane): 31.748,11.252 22.252,11.252 22.252,13 22.252,16.748 31.748,16.748

## Keep-outs
Keep-Out Layer:
  lines w0.1: 1,1 49,1 49,29 1,29

## Other copper
L4:
  rectangle net GND: 39.7,23 40.4,24.5
  rectangle net GND: 39.7,22.6 46.3,23.2
  rectangle net GND: 44.6,14.6 45.2,17.2
  rectangle net GND: 40.6,13.6 41.4,15.7
  rectangle net GND: 44.3,16.2 45.2,18.7
  rectangle net GND: 40.8,18.6 42.4,23
  rectangle net GND: 42.1,17.5 45.2,23
  rectangle net GND: 45.6,22.6 46.3,24.5
  rectangle net GND: 43.6,22.8 44.4,24.6
  rectangle net GND: 41.6,22.8 42.4,24.6
  region net GND: 15.8,28.2 10.8,28.2 10.8,23.8 15.8,23.8
  rectangle net GND: 10.8,1.8 15.8,6.2
L3 (plane layer: these items are gaps in the copper):
  lines w0.5: 22,11 32,11 32,17 ; 50,17 22,17 22,13 22,7 20,7 11.1,7 11.1,3.9 8,3.9 8,9.8 15.6,9.8 15.6,13 10.3,13 10.3,18.2 8,18.2 8,27.4 11.2,27.4 11.2,22.6 14.7,22.6 14.7,20.5 50,20.5

## Silkscreen, mask and mechanical layers (free items; w line width, h text height)
M1 Outline:
  the board outline again, w0.2
M2 Dimension:
  circle w0.254: c0,0 r1.414
  lines w0.2: -1.5,-1.5 1.5,1.5 ; -1.5,1.5 1.5,-1.5
  text "(0,0)" at 0.5,-3.5 h1.52
M3 3D Top:
  text ".Layer_Name" at -11,-44.5 h3.1
M4 3D Bottom:
  text ".Layer_Name" at -11,-44.5 h3.1
M16 Tolerance:
  text ".Layer_Name" at -11,-44.5 h3.1

## Dimensions
0,0 to 0,30 on M2 Dimension
0,0 to 50,0 on M2 Dimension

## Text inside footprints (layer, text, board x,y; h text height)
J1: Bottom Overlay "B02B" at 10.55,13.7 h1 r90
USB1: M14 2D Bottom "PCB EDGE" at -0.178,12.998 h0.8 r90